# EAGLE board board (EAGLE 5.06)
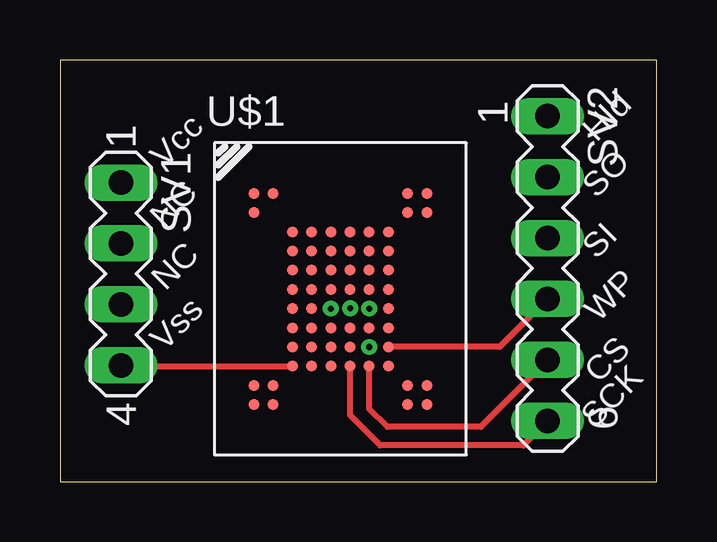
[diagram p0: board, top side]
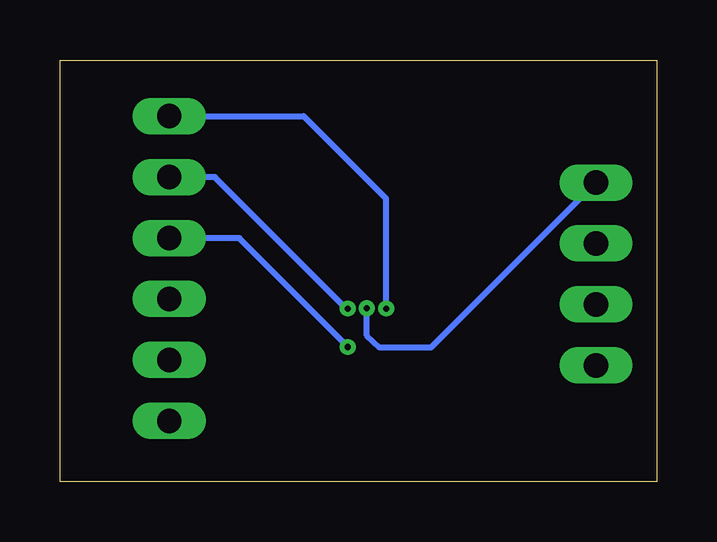
[diagram p1: board, bottom side, seen from below]

Size 24.87 x 17.58 mm. Coordinates in mm from the lower left corner, seen from the top.
Outline: 0,0 24.87,0 24.87,17.58 0,17.58 0,0
Copper layers (1*16): Top 0.035mm / dielectric 1.5mm / Bottom 0.035mm
Design rules "default *": minimum track width 10mil, minimum drill 10mil, track to track 10mil, track to pad 10mil, pad to pad 10mil, via to via 8mil, smd to smd 5mil, copper to edge 40mil, drill to drill 8mil, minimum pad ring 10mil, minimum via ring 8mil, stop-mask expansion 4mil, vias tented up to drill 0mil, thermal gap 10mil

## Footprints (pad centres in the part's own frame; a part is rotated, then mirrored left to right if it is on the bottom)
MA04-1 = drill 1.016 long: 1 -3.81,0; 2 -1.27,0; 3 1.27,0; 4 3.81,0
MA06-1 = drill 1.016 long: 1 -6.35,0; 2 -3.81,0; 3 -1.27,0; 4 1.27,0; 5 3.81,0; 6 6.35,0
63-BALL_VFBGA = smd 0.45 x 0.45: A1 -3.6,4.4; A2 -2.8,4.4; A9 2.8,4.4; A10 3.6,4.4; B1 -3.6,3.6; B9 2.8,3.6; B10 3.6,3.6; C3 -2,2.8; C4 -1.2,2.8; C5 -0.4,2.8; C6 0.4,2.8; C7 1.2,2.8; C8 2,2.8; D3 -2,2; D4 -1.2,2; D5 -0.4,2; D6 0.4,2; D7 1.2,2; D8 2,2; E3 -2,1.2; E4 -1.2,1.2; E5 -0.4,1.2; E6 0.4,1.2; E7 1.2,1.2; E8 2,1.2; F3 -2,0.4; F4 -1.2,0.4; F5 -0.4,0.4; F6 0.4,0.4; F7 1.2,0.4; F8 2,0.4; G3 -2,-0.4; G4 -1.2,-0.4; G5 -0.4,-0.4; G6 0.4,-0.4; G7 1.2,-0.4; G8 2,-0.4; H3 -2,-1.2; H4 -1.2,-1.2; H5 -0.4,-1.2; H6 0.4,-1.2; J3 -2,-2; J4 -1.2,-2; J5 -0.4,-2; J6 0.4,-2; J7 1.2,-2; J8 2,-2; K3 -2,-2.8; K4 -1.2,-2.8; K5 -0.4,-2.8; K6 0.4,-2.8; K7 1.2,-2.8; K8 2,-2.8; L1 -3.6,-3.6; L2 -2.8,-3.6; L9 2.8,-3.6; L10 3.6,-3.6; M1 -3.6,-4.4; M2 -2.8,-4.4; M9 2.8,-4.4; M10 3.6,-4.4; P$8 1.2,-1.2; P$12 2,-1.2
PAD,0.45MM-DIAM = smd 0.45 x 0.45: P$1 0,0

## Placement (x,y rotation side)
SV1  PWR  [MA04-1]  2.54,8.66 270 top
SV2  Data  [MA06-1]  20.32,8.89 270 top
U$1  MT29F1G01ZACHC  [63-BALL_VFBGA]  11.68,7.62 0 top
U$2  PADPAD  [PAD,0.45MM-DIAM]  12.09,7.23 0 top
U$3  PADPAD  [PAD,0.45MM-DIAM]  11.28,7.22 0 top
U$4  PADPAD  [PAD,0.45MM-DIAM]  12.88,7.22 0 top
U$5  PADPAD  [PAD,0.45MM-DIAM]  12.88,5.62 0 top

## Library data of the parts
SV1 SV2 = con-lstb
U$1-U$5 = mylib

## Nets
N$4: SV2.4 U$1.J8
N$5: SV1.1 U$1.G6 U$2.P$1
N$6: SV1.4 U$1.K3
N$7: SV2.5 U$1.K7
N$8: SV2.6 U$1.K6
N$9: SV2.1 U$1.G5 U$3.P$1
N$10: SV2.2 U$1.G7 U$4.P$1
N$11: SV2.3 U$1.J7 U$5.P$1

## Tracks (layer width: path | path; a pad name or v marks a point on that pad's centre or on a via)
N$4
  Top 0.254: SV2.4 18.32,5.62 U$1.J8
N$5  (via drill 0.25 pad 0.13)
  Top 0.254: U$2.P$1 U$1.G6
  Bottom 0.254: SV1.1 9.42,5.59 10.67,5.59 11.56,5.59 12.09,6.1 12.09,7.2 U$2.P$1
  other vias: 12.09,7.23
N$6
  Top 0.254: SV1.4 3.05,4.83 9.65,4.83 U$1.K3
N$7
  Top 0.254: SV2.5 17.53,2.29 13.65,2.29 12.88,3.06 U$1.K7
N$8
  Top 0.254: SV2.6 19.3,1.52 13.34,1.52 12.08,2.77 U$1.K6
N$9  (via drill 0.25 pad 0.13)
  Bottom 0.254: SV2.1 14.72,15.24 11.29,11.81 U$1.G5
  other vias: 11.28,7.22
N$10  (via drill 0.25 pad 0.13)
  Top 0.254: U$4.P$1 | U$4.P$1
  Bottom 0.254: U$4.P$1 13.08,7.37 18.41,12.7 20.19,12.7 SV2.2
  other vias: 12.88,7.22
N$11  (via drill 0.25 pad 0.13)
  Top 0.254: 12.83,5.59 U$5.P$1 12.83,5.59
  Bottom 0.254: U$5.P$1 13.08,5.84 17.4,10.16 20.19,10.16 SV2.3
  other vias: 12.88,5.62

## Text on the board
tPlace: Hld | Vcc | SO | NC | SI | NC | WP | Vss | CS | SCK